# Altium PCB warship_demo_PCB.PcbDoc (part 2 of 3)
Units mm, origin at the board's own origin, x right, y up, seen from the top; angles counter-clockwise.
Board outline 160.38 x 121.38 mm, 2 copper layers (Top Layer, Bottom Layer); 272 components, 249 nets, 1200 pads, 295 vias.
Unrouted connection lines stored in the file: 2.
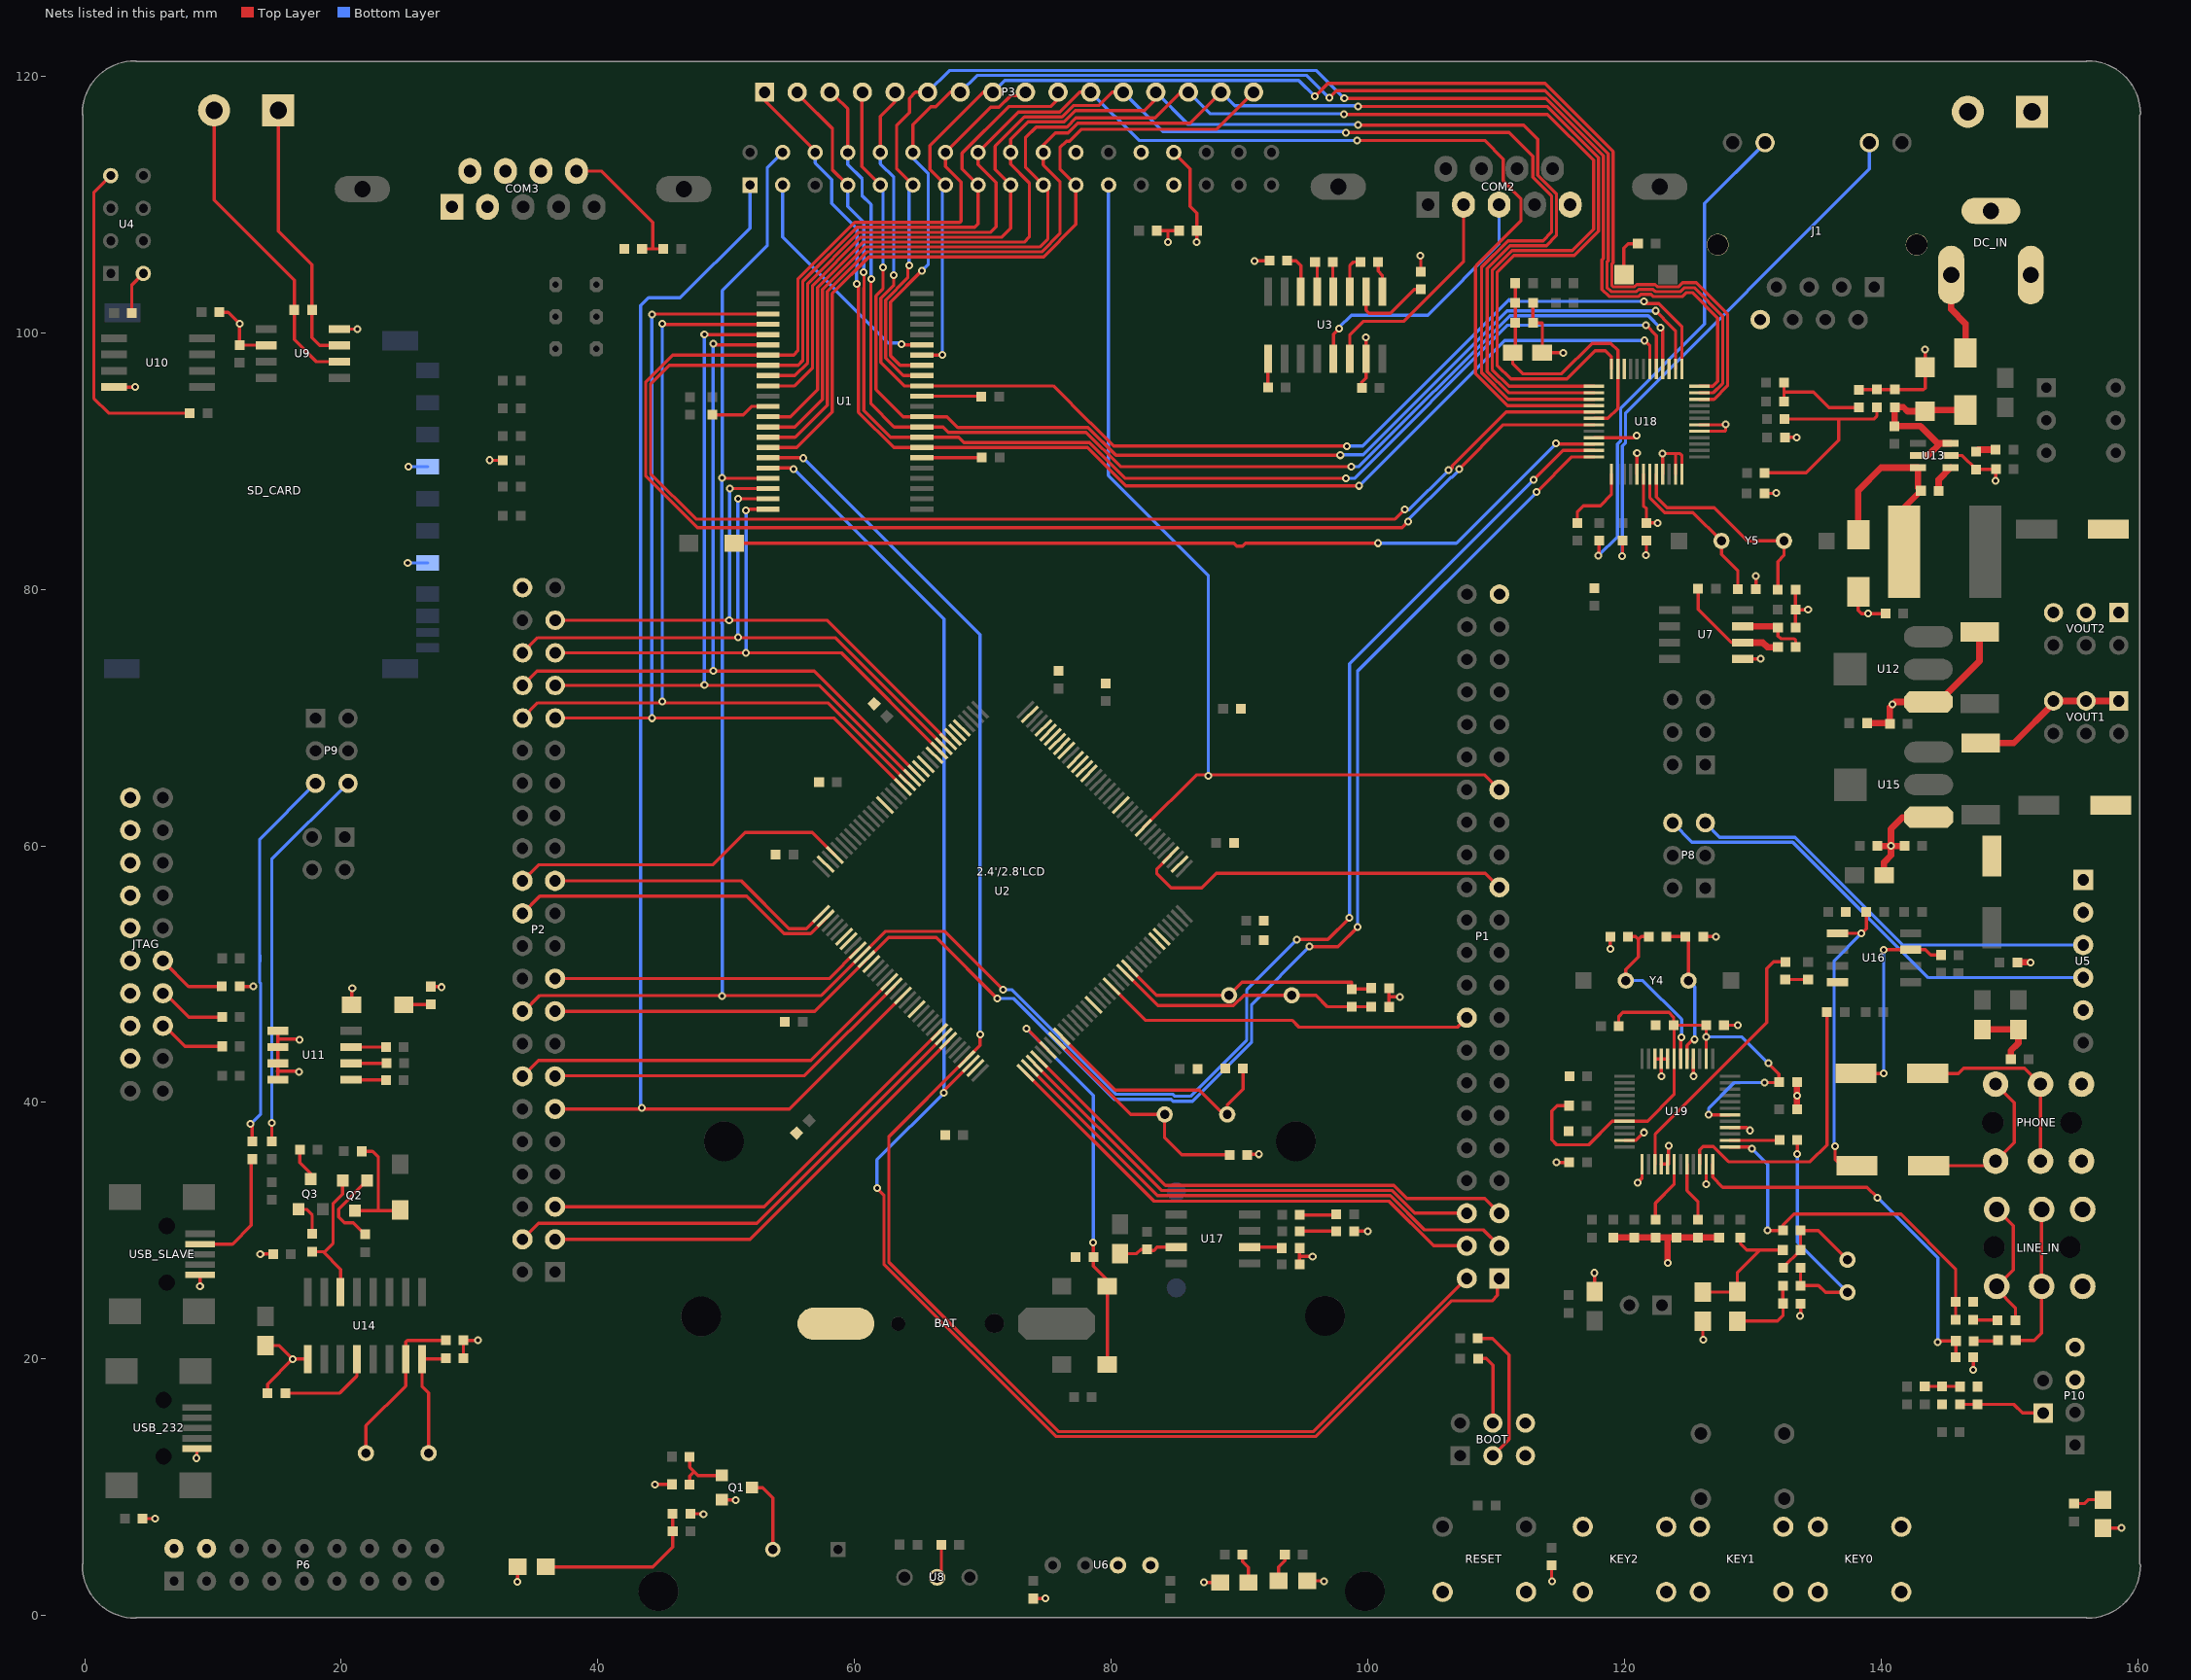
[diagram p2: the nets of this part, all layers, seen from the top]

## Via types
v1: diameter 0.61, hole 0.305, Top Layer to Bottom Layer, 291 vias
v2: diameter 3.58, hole 2.5, Top Layer to Bottom Layer, tented both sides, 4 vias

## Nets (pads, with @x,y where several pads share a name; then routed paths per layer and width w, separated by ;. In a path a pad name is that pad's centre, name@x,y a point inside that pad or via, vN(x,y) a via of type N, cw(c..) or ccw(c..) an arc to the next point about the centre after c; other vN are vias at no path point) (continued)
FSMC_A12: P2.38 U1.28 U2.87 | length 64.3
  Top Layer w0.254: P2.38@34.123,72.506 35.251,73.635 v1(48.971,73.635) 56.84,73.635 U2.87@64.819,65.656 ; v1(48.971,99.136) 48.971,99.052 U1.28@53.242,99.052
  Bottom Layer w0.254: v1(48.971,73.635) v1(48.971,99.136)
FSMC_A13: P2.37 U1.27 U2.88 | length 63
  Top Layer w0.254: P2.37@36.663,72.506 57.262,72.506 U2.88@64.465,65.303 ; v1(48.285,99.847) 48.29,99.852 U1.27@53.242,99.852
  Bottom Layer w0.254: v1(48.285,72.542) v1(48.285,99.847)
FSMC_A14: P2.36 U1.26 U2.89 | length 70.7
  Top Layer w0.254: P2.36@34.123,69.966 35.302,71.145 57.915,71.145 U2.89@64.112,64.949 ; v1(45.009,100.686) 45.042,100.652 U1.26@53.242,100.652
  Bottom Layer w0.254: v1(45.009,71.272) v1(45.009,100.686)
FSMC_A15: P2.35 U1.25 U2.90 | length 69.8
  Top Layer w0.254: P2.35@36.663,69.966 58.387,69.966 U2.90@63.758,64.596 ; v1(44.196,101.422) 44.226,101.452 U1.25@53.242,101.452
  Bottom Layer w0.254: v1(44.196,69.952) v1(44.196,101.422)
FSMC_A16: P2.41 U1.42 U2.80 | length 47.9
  Top Layer w0.254: P2.41@36.663,77.586 v1@50.216,77.586 ; v1(50.216,77.572) v1@50.216,77.586 ; v1(50.267,87.859) 50.273,87.852 U1.42@53.242,87.852 ; U2.80@67.294,68.131 57.838,77.586 v1@50.216,77.586
  Bottom Layer w0.254: v1(50.216,77.572) 50.267,77.521 v1(50.267,87.859)
FSMC_A17: P2.40 U1.43 U2.81 | length 49.9
  Top Layer w0.254: P2.40@34.123,75.046 35.302,76.225 58.492,76.225 U2.81@66.94,67.778 ; v1(50.902,87.046) 50.908,87.052 U1.43@53.242,87.052
  Bottom Layer w0.254: v1(50.902,76.251) v1(50.902,87.046)
FSMC_A18: P2.39 U1.44 U2.82 | length 45.9
  Top Layer w0.254: P2.39@36.663,75.046 58.964,75.046 U2.82@66.587,67.424 ; v1(51.537,86.131) 51.657,86.252 U1.44@53.242,86.252
  Bottom Layer w0.254: v1(51.537,75.057) v1(51.537,86.131)
FSMC_D0: 2.4'/2.8'LCD.6 P3.1 U1.7 U2.85 U18.18 | length 99.1
  Top Layer w0.254: P3.1@53.01,119.151 53.01,118.085 56.921,114.173 2.4'/2.8'LCD.6@56.921,114.046 ; v1(60.173,103.81) 60.249,103.81 60.3,103.759 60.3,93.797 63.044,91.052 U1.7@65.242,91.052 78.137,91.052 81.128,88.062 v1(99.314,88.062) ; v1(121.539,99.39) 121.963,98.966 U18.18@121.963,97.168
  Bottom Layer w0.254: 2.4'/2.8'LCD.6@56.921,114.046 56.921,113.233 58.217,111.938 58.217,110.058 60.173,108.102 60.173,104.981 60.147,104.956 60.147,103.835 v1(60.173,103.81) ; v1(99.314,88.062) 110.642,99.39 v1(121.539,99.39)
FSMC_D1: 2.4'/2.8'LCD.7 P3.2 U1.8 U2.86 U18.17 | length 98.9
  Top Layer w0.254: P3.2@55.207,118.427 55.74,118.427 58.268,115.9 58.268,112.696 2.4'/2.8'LCD.7@59.463,111.5 ; v1(60.706,104.724) 60.731,104.699 60.731,103.502 60.706,103.477 60.706,93.929 62.783,91.852 U1.8@65.242,91.852 68.092,91.852 68.511,91.433 78.295,91.433 81.082,88.646 v1(98.273,88.646) ; v1(121.659,100.584) 122.463,99.781 U18.17@122.463,97.168
  Bottom Layer w0.254: 2.4'/2.8'LCD.7@59.463,111.5 59.463,109.853 60.706,108.61 v1(60.706,104.724) ; v1(98.273,88.646) 98.933,88.646 110.871,100.584 v1(121.659,100.584)
FSMC_D2: 2.4'/2.8'LCD.8 P3.3 U1.9 U2.114 U18.16 | length 98
  Top Layer w0.254: P3.3@57.747,118.427 58.483,118.427 59.463,117.448 2.4'/2.8'LCD.8@59.463,114.04 ; v1(61.29,104.191) 61.265,104.165 61.265,94.463 63.075,92.652 U1.9@65.242,92.652 66.885,92.652 67.304,92.233 78.034,92.233 80.707,89.56 v1(98.679,89.56) ; v1(122.784,100.381) 122.963,100.202 U18.16@122.963,97.168
  Bottom Layer w0.254: 2.4'/2.8'LCD.8@59.463,114.04 59.463,113.104 60.579,111.989 60.579,110.693 61.29,109.982 v1(61.29,104.191) ; v1(98.679,89.56) 99.289,89.56 111.049,101.321 121.844,101.321 v1(122.784,100.381)
FSMC_D3: 2.4'/2.8'LCD.9 P3.4 U1.10 U2.115 U18.14 | length 96.8
  Top Layer w0.254: P3.4@60.554,118.745 60.554,112.954 2.4'/2.8'LCD.9@62.001,111.506 ; v1(62.205,105.08) 62.205,103.42 61.646,102.861 61.646,95.58 63.774,93.452 U1.10@65.242,93.452 67.203,93.452 68.041,92.614 78.192,92.614 80.356,90.449 v1(97.841,90.449) ; v1(122.428,101.702) 122.987,101.143 122.987,101.112 123.963,100.136 U18.14@123.963,97.168
  Bottom Layer w0.254: 2.4'/2.8'LCD.9@62.001,111.506 62.205,111.303 v1(62.205,105.08) ; v1(97.841,90.449) 97.866,90.475 99.619,90.475 110.846,101.702 v1(122.428,101.702)
FSMC_D4: 2.4'/2.8'LCD.10 P3.5 U1.13 U2.58 U18.13 | length 95.8
  Top Layer w0.254: 2.4'/2.8'LCD.10@62.001,114.046 62.001,116.865 63.094,117.958 P3.5@63.094,118.161 ; v1(63.043,104.47) 63.043,103.719 62.027,102.703 62.027,97.688 63.863,95.852 U1.13@65.242,95.852 75.471,95.852 78.328,92.995 78.35,92.995 80.184,91.161 v1(98.349,91.161) ; v1(121.514,102.438) 121.691,102.26 122.659,102.26 124.463,100.457 U18.13@124.463,97.168
  Bottom Layer w0.254: 2.4'/2.8'LCD.10@62.001,114.046 62.001,113.157 63.043,112.116 v1(63.043,104.47) ; v1(98.349,91.161) 99.593,91.161 110.998,102.565 111.125,102.438 v1(121.514,102.438)
FSMC_D5: 2.4'/2.8'LCD.11 P3.6 U1.14 U2.59 U18.12 | length 110.5
  Top Layer w0.254: v1(64.237,105.258) 64.135,105.156 64.135,104.272 62.408,102.545 62.408,98.039 63.794,96.652 U1.14@65.242,96.652 ; 2.4'/2.8'LCD.11@64.541,111.506 63.271,112.776 63.271,116.18 64.262,117.17 64.262,118.262 64.745,118.745 P3.6@65.684,118.745 ; v1(98.146,118.262) 113.874,118.262 118.339,113.797 118.339,105.774 118.237,105.672 118.237,103.37 118.788,102.819 121.09,102.819 121.268,102.997 122.039,102.997 122.217,102.819 124.519,102.819 124.824,103.124 125.273,103.124 127.254,101.143 127.254,96.19 126.882,95.818 U18.12@125.813,95.818
  Bottom Layer w0.254: v1(64.237,105.258) 64.237,111.201 2.4'/2.8'LCD.11@64.541,111.506 ; P3.6@65.684,118.745 67.374,120.435 95.973,120.435 v1(98.146,118.262)
FSMC_D6: 2.4'/2.8'LCD.12 P3.7 U1.15 U2.60 U18.11 | length 109.4
  Top Layer w0.254: 2.4'/2.8'LCD.12@64.541,114.046 64.541,116.205 65.938,117.602 66.319,117.602 67.462,118.745 P3.7@68.224,118.745 ; v1(65.227,104.826) 62.789,102.387 62.789,98.196 63.533,97.452 U1.15@65.242,97.452 ; v1(96.977,118.313) 97.536,118.872 113.803,118.872 118.72,113.955 118.72,105.616 118.618,105.514 118.618,103.528 118.945,103.2 120.932,103.2 121.11,103.378 122.197,103.378 122.374,103.2 124.361,103.2 124.666,103.505 125.431,103.505 127.635,101.301 127.635,96.032 126.921,95.318 U18.11@125.813,95.318
  Bottom Layer w0.254: 2.4'/2.8'LCD.12@64.541,114.046 64.541,113.589 65.735,112.395 65.735,105.334 v1(65.227,104.826) ; P3.7@68.224,118.745 69.533,120.054 95.237,120.054 v1(96.977,118.313)
FSMC_D7: 2.4'/2.8'LCD.13 P3.8 U1.16 U2.63 U18.10 | length 106
  Top Layer w0.254: U1.16@65.242,98.252 66.807,98.252 v1(66.827,98.273) ; 2.4'/2.8'LCD.13@67.081,111.506 65.862,112.725 65.862,114.579 70.028,118.745 P3.8@70.764,118.745 ; v1(95.86,118.415) 96.876,119.431 113.783,119.431 119.101,114.113 119.101,105.458 118.999,105.357 118.999,103.685 119.103,103.581 120.774,103.581 120.952,103.759 122.354,103.759 122.532,103.581 124.203,103.581 124.508,103.886 125.588,103.886 128.016,101.458 128.016,95.874 126.96,94.818 U18.10@125.813,94.818
  Bottom Layer w0.254: v1(66.827,98.273) 66.827,111.252 2.4'/2.8'LCD.13@67.081,111.506 ; P3.8@70.764,118.745 71.692,119.673 94.602,119.673 v1(95.86,118.415)
FSMC_D8: 2.4'/2.8'LCD.14 P3.9 U1.29 U2.64 U18.31 | length 133.4
  Top Layer w0.254: P3.9@73.304,118.745 73.025,118.466 72.136,118.466 71.247,117.577 70.612,117.577 2.4'/2.8'LCD.14@67.081,114.046 67.081,112.954 68.301,111.735 68.301,108.687 68.199,108.585 60.005,108.585 55.575,104.155 55.575,98.577 55.25,98.252 U1.29@53.242,98.252 45.821,98.252 43.713,96.144 43.713,88.844 47.747,84.811 102.641,84.811 v1(103.124,85.293) ; v1(107.112,89.383) 107.112,89.385 110.544,92.818 U18.31@117.613,92.818
  Bottom Layer w0.254: v1(103.124,85.293) 103.124,85.395 106.451,88.722 106.505,88.722 107.112,89.329 v1(107.112,89.383)
FSMC_D9: 2.4'/2.8'LCD.15 P3.10 U1.30 U2.65 U18.29 | length 135
  Top Layer w0.254: P3.10@75.794,118.161 75.26,117.627 71.984,117.627 68.351,113.995 68.351,112.776 2.4'/2.8'LCD.15@69.621,111.506 69.621,108.483 69.342,108.204 60.163,108.204 55.956,103.998 55.956,97.821 55.587,97.452 U1.30@53.242,97.452 45.56,97.452 44.094,95.987 44.094,89.002 47.625,85.471 102.108,85.471 v1(102.845,86.208) ; v1(106.274,89.281) 106.375,89.281 106.553,89.459 106.553,89.614 110.757,93.818 U18.29@117.613,93.818
  Bottom Layer w0.254: v1(102.845,86.208) 103.2,86.208 v1(106.274,89.281)
FSMC_D10: 2.4'/2.8'LCD.16 P3.11 U1.31 U2.66 U18.28 | length 106.6
  Top Layer w0.254: U1.31@53.242,96.652 55.326,96.652 56.337,97.663 56.337,103.84 60.32,107.823 70.587,107.823 71.018,108.255 71.018,111.709 69.621,113.106 2.4'/2.8'LCD.16@69.621,114.046 72.771,117.196 75.997,117.196 77.546,118.745 P3.11@78.384,118.745 ; v1(99.162,114.986) 109.093,114.986 110.541,113.538 110.541,111.836 111.912,110.465 111.912,108.708 108.467,105.263 108.467,105.241 108.382,105.156 108.382,96.809 110.873,94.318 U18.28@117.613,94.318
  Bottom Layer w0.254: P3.11@78.384,118.745 82.144,114.986 v1(99.162,114.986)
FSMC_D11: 2.4'/2.8'LCD.17 P3.12 U1.32 U2.67 U18.27 | length 111.3
  Top Layer w0.254: U1.32@53.242,95.852 55.314,95.852 56.718,97.257 56.718,103.682 60.478,107.442 71.476,107.442 72.161,108.128 2.4'/2.8'LCD.17@72.161,111.506 70.942,112.725 70.942,114.529 73.228,116.815 76.155,116.815 77.044,117.704 79.019,117.704 80.061,118.745 P3.12@80.924,118.745 ; v1(98.273,115.595) 110.998,115.595 112.852,113.741 112.852,112.11 114.3,110.662 114.3,107.823 113.64,107.163 110.906,107.163 108.848,105.105 108.848,96.881 110.911,94.818 U18.27@117.613,94.818
  Bottom Layer w0.254: P3.12@80.924,118.745 83.998,115.672 98.196,115.672 v1(98.273,115.595)
FSMC_D12: 2.4'/2.8'LCD.18 P3.13 U1.35 U2.68 U18.26 | length 114.5
  Top Layer w0.254: U1.35@53.242,93.452 54.996,93.452 57.099,95.555 57.099,103.524 60.636,107.061 73.203,107.061 73.609,107.467 73.609,111.684 72.161,113.132 2.4'/2.8'LCD.18@72.161,114.046 72.161,115.087 73.508,116.434 76.312,116.434 77.201,117.323 82.575,117.323 P3.13@83.414,118.161 ; v1(99.238,116.18) 112.116,116.18 113.233,115.062 113.233,112.268 114.681,110.82 114.681,107.569 113.894,106.782 111.063,106.782 109.296,105.014 109.296,96.972 110.95,95.318 U18.26@117.613,95.318
  Bottom Layer w0.254: P3.13@83.464,118.745 85.979,116.23 v1@99.289,116.23
FSMC_D13: 2.4'/2.8'LCD.19 P3.14 U1.36 U2.77 U18.25 | length 120.3
  Top Layer w0.254: U1.36@53.242,92.652 55.339,92.652 57.48,94.793 57.48,103.366 60.794,106.68 74.411,106.68 75.057,107.326 75.057,111.15 2.4'/2.8'LCD.19@74.701,111.506 73.304,112.903 73.304,115.189 74.143,116.027 76.53,116.027 77.241,116.738 83.414,116.738 85.42,118.745 P3.14@86.004,118.745 ; v1(98.12,117.018) 113.995,117.018 117.577,113.436 117.577,108.057 115.92,106.401 111.221,106.401 109.677,104.857 109.677,97.13 110.989,95.818 U18.25@117.613,95.818
  Bottom Layer w0.254: P3.14@86.004,118.745 87.681,117.069 98.069,117.069 v1(98.12,117.018)
FSMC_D14: 2.4'/2.8'LCD.20 P3.15 U1.37 U2.78 U18.24 | length 122.7
  Top Layer w0.254: U1.37@53.242,91.852 55.352,91.852 57.861,94.361 57.861,103.208 60.952,106.299 74.569,106.299 75.997,107.727 75.997,111.785 74.701,113.081 2.4'/2.8'LCD.20@74.701,114.046 74.701,114.63 75.641,115.57 76.612,115.57 77.374,116.332 86.131,116.332 P3.15@88.544,118.745 ; v1(99.212,117.627) 113.97,117.627 117.958,113.64 117.958,107.899 116.078,106.02 111.379,106.02 110.058,104.699 110.058,97.46 111.125,96.393 115.494,96.393 117.704,98.603 118.491,98.603 118.963,98.131 U18.24@118.963,97.168
  Bottom Layer w0.254: P3.15@88.544,118.745 89.611,117.678 99.162,117.678 v1(99.212,117.627)
FSMC_D15: 2.4'/2.8'LCD.21 P3.16 U1.38 U2.79 U18.22 | length 60
  Top Layer w0.254: U1.38@53.242,91.052 55.492,91.052 58.242,93.802 58.242,103.051 61.11,105.918 74.727,105.918 77.241,108.433 2.4'/2.8'LCD.21@77.241,111.506 75.997,112.751 75.997,114.427 76.505,114.935 76.733,114.935 77.648,115.849 88.189,115.849 P3.16@91.084,118.745
FSMC_NBL0: P1.2 U1.39 U2.141 | length 129.5
  Top Layer w0.254: U1.39@53.242,90.252 55.976,90.252 v1(56.007,90.221) ; v1(69.774,45.288) 69.774,44.448 U2.141@68.708,43.382 62.662,37.336 62.662,27.559 75.87,14.351 95.758,14.351 P1.2@107.696,26.289
  Bottom Layer w0.254: v1(56.007,90.221) 69.774,76.454 v1(69.774,45.288)
FSMC_NBL1: P1.1 U1.40 U2.142 | length 134
  Top Layer w0.254: U1.40@53.242,89.452 55.176,89.452 v1(55.245,89.383) ; v1(61.747,33.325) 62.281,32.791 62.281,27.401 75.712,13.97 95.916,13.97 106.482,24.536 109.652,24.536 110.084,24.968 110.084,26.441 P1.1@110.236,26.289 ; v1(66.954,40.742) 66.954,40.922 U2.142@69.061,43.029
  Bottom Layer w0.254: v1(55.245,89.383) 66.954,77.673 v1(66.954,40.742) 61.747,35.535 v1(61.747,33.325)
FSMC_NE2: P2.14 R64.1 U2.124 U18.37 | length 37.3
  Top Layer w0.254: P2.14@34.112,42.037 35.357,43.282 56.586,43.282 U2.124@62.697,49.393 ; R64.1@116.308,85.166 116.308,86.031 116.789,86.512 118.114,86.512 118.963,87.361 U18.37@118.963,88.968
FSMC_NE3: P2.13 R1.1 U1.6 U2.125 | length 34
  Top Layer w0.254: P2.13@36.652,42.037 36.703,42.088 56.1,42.088 U2.125@63.051,49.039 ; U1.6@65.242,90.252 69.881,90.252 R1.1@69.901,90.272
FSMC_NE4: 2.4'/2.8'LCD.1 P2.11 U2.127 | length 107.7
  Top Layer w0.254: P2.11@36.652,39.497 54.923,39.497 U2.127@63.758,48.332
  Bottom Layer w0.254: v1(43.409,39.573) 43.332,39.649 43.332,102.108 43.942,102.718 46.406,102.718 51.841,108.153 2.4'/2.8'LCD.1@51.841,111.506
FSMC_NOE: 2.4'/2.8'LCD.4 P2.18 U1.41 U2.118 U18.35 | length 197.4
  Top Layer w0.254: P2.18@34.112,47.117 34.239,47.117 35.458,48.336 57.398,48.336 U2.118@60.576,51.514 62.402,53.34 67.005,53.34 v1(71.552,48.793) ; v1(49.682,88.697) 49.727,88.652 U1.41@53.242,88.652 ; v1(94.463,52.705) 96.876,52.705 v1(98.552,54.381) ; v1(112.903,88.544) 115.176,90.818 U18.35@117.613,90.818
  Bottom Layer w0.254: v1(49.682,48.311) 49.682,77.315 49.657,77.34 49.657,88.671 v1(49.682,88.697) 49.682,103.276 53.188,106.782 53.188,112.852 2.4'/2.8'LCD.4@54.381,114.046 ; v1(71.552,48.793) 72.226,48.793 80.379,40.64 84.803,40.64 84.955,40.488 86.157,40.488 90.551,44.882 90.551,48.793 v1(94.463,52.705) ; v1(98.552,54.381) 98.552,74.193 v1(112.903,88.544)
FSMC_NWE: 2.4'/2.8'LCD.3 P2.17 U1.17 U2.119 U18.36 | length 141.2
  Top Layer w0.254: P2.17@36.652,47.117 56.886,47.117 U2.119@60.93,51.161 62.627,52.857 66.345,52.857 v1(71.095,48.108) ; v1(63.652,99.111) 63.711,99.052 U1.17@65.242,99.052 ; v1(95.428,52.146) 97.663,52.146 v1(99.187,53.67) ; v1(113.132,87.579) 115.87,90.318 U18.36@117.613,90.318
  Bottom Layer w0.254: 2.4'/2.8'LCD.3@54.381,111.506 54.381,107.442 62.611,99.212 63.551,99.212 v1(63.652,99.111) ; v1(71.095,48.108) 72.373,48.108 80.221,40.259 84.645,40.259 84.797,40.107 86.315,40.107 90.932,44.724 90.932,47.65 v1(95.428,52.146) ; v1(99.187,53.67) 99.187,73.635 v1(113.132,87.579)
GBC_KEY: P1.25 P10.3 U2.40 U5.2 | length 30
  Top Layer w0.254: U2.40@84.618,59.292 83.541,58.215 83.541,57.836 84.658,56.718 87.046,56.718 88.189,57.861 109.144,57.861 P1.25@110.236,56.769
GBC_LED: JTAG.5 P2.24 R6.2 U2.110 U5.1 | length 31.2
  Top Layer w0.254: JTAG.5@6.096,45.974 6.223,45.974 7.822,44.375 R6.2@10.706,44.375 ; P2.24@34.112,54.737 35.458,56.083 51.587,56.083 54.508,53.162 56.567,53.162 U2.110@57.748,54.343
GBC_RX: P8.5 U5.3 | length 33.4
  Bottom Layer w0.254: P8.5@126.289,61.798 127.406,60.681 133.254,60.681 141.661,52.273 U5.3@155.727,52.273
GBC_TX: P8.6 U5.4 | length 37
  Bottom Layer w0.254: P8.6@123.749,61.798 125.247,60.3 133.096,60.3 143.662,49.733 U5.4@155.727,49.733
GBUF: R77.2 U19.42 | length 4.9
  Top Layer w0.254: R77.2@122.403,30.861 122.403,32.157 123.85,33.604 U19.42@123.85,35.196
GND: 2.4'/2.8'LCD.22 2.4'/2.8'LCD.26 2.4'/2.8'LCD.27 BAT.2 BOOT.5 BOOT.6 C1.1 C2.2 C3.1 C4.2 C5.1 C6.1 C7.1 C8.1 C9.2 C10.1 C11.2 C12.2 C13.1 C14.1 C15.1 C16.1 C17.1 C18.1 C19.1 C20.1 C21.1 C22.1 C23.1 C24.1 C25.1 C26.2 C28.2 C30.2 C31.2 C32.1 C33.2 C34.1 C35.2 C36.2 C37.1 C38.1 C39.1 C42.1 C43.1 C44.2 C45.1 C46.1 C47.2 C48.1 C49.1 C50.2 C51.1 C52.1 C53.1 C54.1 C55.1 C56.1 C57.1 C63.1 C64.1 C65.2 C66.1 C67.1 C68.1 C69.1 C70.2 C71.2 C72.1 C74.1 C75.1 C76.1 C77.1 C78.1 C79.1 C80.1 C81.1 C82.1 C83.1 C84.1 C85.1 C86.1 C87.1 C88.2 C89.1 C91.1 C92.1 C93.1 C94.1 C97.1 C98.1 C100.2 C103.1 C104.1 C105.1 C106.1 COM2.5 COM3.1 COM3.6 COM3.7 COM3.8 D3.1 D4.1 D6.2 D7.2 DC_IN.2 DC_IN.3 J1.8 J1.13 J1.14 JTAG.4 JTAG.6 JTAG.8 JTAG.10 JTAG.12 JTAG.14 JTAG.16 JTAG.18 JTAG.20 KEY0.1 KEY1.1 KEY2.1 LINE_IN.3 LS1.1 P1.43 P2.44 P6.2 P10.4 PHONE.3 PWR.2 Q1.1 R13.1 R19.2 R38.1 R43.2 R52.2 R60.2 R62.2 R63.1 R70.1 R76.2 R77.1 RESET.2 SD_CARD.3 SD_CARD.6 U1.12 U1.34 U2.16 U2.30 U2.31 U2.38 U2.51 U2.61 U2.71 U2.83 U2.94 U2.107 U2.120 U2.130 U2.143 U3.15 U4.1 U5.5 U6.3 U6.4 U7.5 U8.2 U9.2 U9.8 U10.4 U11.1 U11.2 U11.3 U11.4 U12.1 U13.2 U14.1 U15.1 U16.4 U17.7 U18.5 U18.6 U18.15 U18.33 U18.41 U18.45 U18.47 U18.48 U19.4 U19.16 U19.20 U19.21 U19.22 U19.35 U19.37 U19.40 U19.41 U19.47 USB_232.5 USB_SLAVE.5 VOUT1.1 VOUT1.3 VOUT1.5 VOUT2.1 VOUT2.3 VOUT2.5 | length 205.1
  Top Layer w0.254: U10.4@2.286,95.758 v1(3.937,95.758) ; C31.2@3.67,101.522 3.67,103.721 U4.1@4.572,104.623 ; C26.2@4.508,7.568 5.485,7.568 v1(5.483,7.569) ; v1(8.696,12.284) 8.747,12.284 USB_232.5@8.747,13.021 ; v1(8.993,25.681) USB_SLAVE.5@8.993,26.569 ; C38.1@10.49,101.6 11.176,101.6 v1(12.065,100.711) C37.1@12.065,99.035 14.116,99.035 U9.2@14.14,99.011 ; R13.1@12.065,49.047 v1(13.157,49.047) ; v1(13.691,28.194) C50.2@14.681,28.194 ; C51.1@14.099,21.057 15.145,21.057 v1(16.196,20.006) ; C55.1@14.249,17.348 14.249,18.059 v1(16.196,20.006) ; 15.026,42.443 v1@16.662,42.443 ; U11.4@15.052,41.781 U11.3@15.052,43.051 U11.2@15.052,44.321 U11.1@15.052,45.591 ; 15.052,44.933 v1@16.688,44.933 ; U14.1@17.399,20.006 v1(16.196,20.006) ; U9.8@20.269,100.281 20.271,100.279 v1(21.26,100.279) ; D3.1@20.803,47.623 20.803,48.87 v1(20.853,48.92) ; C56.1@29.515,20.066 C57.1@29.515,21.463 v1(30.632,21.463) ; v1(31.547,90.068) 31.571,90.045 C36.2@32.575,90.045 ; v1(33.731,2.642) LS1.1@33.731,3.81 ; v1(44.453,10.236) 44.452,10.238 R38.1@45.758,10.238 ; C1.1@48.92,93.599 51.308,93.599 51.961,94.252 U1.34@53.242,94.252 ; Q1.1@49.65,9.032 50.709,9.032 v1(50.724,9.017) ; U1.12@65.242,95.052 69.834,95.052 C2.2@69.863,95.023 ; U8.2@66.421,2.997 66.751,3.327 C39.1@66.751,5.537 ; C35.2@73.912,1.333 74.663,1.333 74.676,1.346 v1(74.854,1.346) ; C65.2@80.67,28.219 81.966,28.219 82.296,28.55 C66.1@82.779,28.55 82.855,28.473 83.312,28.473 83.566,28.727 U17.7@85.065,28.727 ; C3.1@83.541,107.95 84.41,107.95 ; v1(84.404,107.061) 84.41,107.067 84.41,107.95 ; C4.2@85.281,107.952 85.279,107.95 84.41,107.95 ; C5.1@90.576,35.966 v1(91.491,35.966) ; v1(91.161,105.588) 91.44,105.588 91.413,105.615 C30.2@92.316,105.615 ; R52.2@94.666,27.381 94.666,28.016 ; C67.1@94.666,28.651 94.666,28.016 ; v1(95.682,27.991) 95.656,28.016 94.666,28.016 ; C72.1@98.908,29.972 v1(99.974,29.972) ; C25.1@99.517,95.682 99.517,96.139 99.847,96.469 U3.15@99.847,97.984 v1(99.847,99.644) ; C9.2@101.638,47.446 101.638,48.235 ; C8.1@101.638,48.919 101.638,48.235 ; v1(102.489,48.235) 101.638,48.235 ; v1(104.089,105.994) 104.116,105.967 C28.2@104.116,104.762 ; C83.1@112.852,102.311 C84.1@112.852,100.762 113.589,100.762 113.589,98.476 C86.1@113.563,98.45 115.189,98.45 v1(115.214,98.425) ; C12.2@114.298,3.924 114.298,2.694 v1(114.325,2.667) ; v1(114.681,35.331) 114.683,35.33 R70.1@115.672,35.33 ; U18.33@117.613,91.818 120.774,91.818 v1(120.929,91.973) ; v1(117.627,26.721) 117.653,26.695 C10.1@117.653,25.273 ; v1(118.872,51.968) C87.1@118.872,52.934 ; C82.1@119.939,104.521 119.939,106.604 120.269,106.934 C81.1@121.031,106.934 ; U19.35@120,37.046 120.866,37.046 v1(121.488,37.668) ; v1(120.955,90.627) 120.963,90.619 U18.41@120.963,88.968 ; v1(121.006,33.757) 121.35,34.101 U19.37@121.35,35.196 ; v1(121.666,82.652) 121.691,82.677 C85.1@121.691,83.795 ; U19.22@122.35,43.396 U19.21@122.85,43.396 ; U19.40@122.85,35.196 123.419,35.196 v1(123.419,36.627) ; v1(122.85,42.046) U19.21@122.85,43.396 ; U18.45@122.963,88.968 122.963,90.575 122.961,90.576 123.914,90.576 ; U19.20@123.35,43.396 U19.21@122.85,43.396 ; U18.47@123.963,88.968 123.963,90.528 123.914,90.576 ; U18.48@124.463,88.968 124.463,90.421 124.308,90.576 123.914,90.576 ; v1(125.35,42.064) U19.16@125.35,43.396 ; U18.5@125.813,92.318 127.799,92.318 127.864,92.383 v1(127.864,92.837) 127.844,92.818 U18.6@125.813,92.818 ; C89.1@126.086,22.936 126.086,21.539 v1(126.111,21.514) ; C88.2@126.111,52.934 v1(127.102,52.934) ; v1(126.35,33.64) U19.47@126.35,35.196 ; C74.1@127.737,46.025 v1(128.803,46.025) ; U19.4@128.2,38.046 129.518,38.046 129.743,37.821 v1(129.769,37.821) ; U7.5@129.195,74.574 130.556,74.574 v1(130.581,74.6) ; C97.1@130.2,80.01 130.226,80.035 v1(130.226,81.026) ; R63.1@130.886,87.478 131.75,87.478 v1(131.801,87.528) ; C100.2@132.474,91.845 133.399,91.845 v1(133.401,91.846) ; C98.1@133.312,79.958 C34.1@133.312,78.41 ; R19.2@133.325,77.013 133.312,77.025 C34.1@133.312,78.41 ; v1(133.68,23.368) 133.719,23.407 R76.2@133.719,24.33 ; v1(134.29,78.41) C34.1@133.312,78.41 ; D4.1@138.201,79.807 138.201,78.359 138.454,78.107 C54.1@140.322,78.107 ; C106.1@138.252,95.555 143.281,95.555 143.408,95.682 C48.1@143.408,97.307 v1(143.408,98.704) ; U13.2@145.39,90.424 146.315,90.424 R43.2@147.395,89.344 148.907,89.344 C46.1@148.92,89.357 148.92,88.468 v1(148.895,88.443) ; v1(147.168,19.152) C103.1@147.168,20.142 ; PWR.2@157.277,6.832 v1(158.724,6.832)
  Top Layer w0.508: C42.1@119.099,29.477 C91.1@120.75,29.477 R77.1@122.402,29.477 123.342,29.477 ; v1(123.368,27.483) 123.342,27.508 123.342,29.477 ; C93.1@127.355,29.477 C94.1@125.704,29.477 C92.1@124.053,29.477 123.342,29.477 ; C79.1@133.426,39.472 C76.1@133.426,41.58 ; C43.1@138.887,69.571 140.614,69.571 C45.1@140.665,69.52 140.665,70.815 141.072,71.222 U12.1@143.662,71.222 144.475,71.222 147.65,74.397 D6.2@147.65,76.683 ; C52.1@139.7,59.995 v1(140.747,59.995) ; C53.1@140.208,57.709 140.208,58.725 140.747,59.264 v1(140.747,59.995) ; C71.2@141.796,59.996 141.794,59.995 v1(140.747,59.995) ; U15.1@143.688,62.23 141.656,62.23 140.747,61.321 v1(140.747,59.995) ; D7.2@147.752,68.021 150.317,68.021 153.594,71.298 VOUT1.3@155.956,71.298 VOUT1.1@158.496,71.298 ; C68.1@147.88,45.695 C69.1@150.674,45.695 150.674,44.629 150.089,44.044 C32.1@150.089,43.358 ; R60.2@150.584,50.925 151.614,50.925 v1(151.638,50.902)
  Bottom Layer w0.254: v1(25.171,82.067) 25.185,82.054 SD_CARD.6@26.721,82.054 ; v1(25.222,89.56) 25.229,89.554 SD_CARD.3@26.721,89.554
  other v1: 133.426,40.526 16.713,42.393 16.739,44.882 140.868,71.018 138.963,78.107 122.955,90.583
IIC_SCL: P2.4 R39.2 U2.136 U11.6 | length 42.1
  Top Layer w0.254: U11.6@20.752,43.051 20.755,43.055 R39.2@23.508,43.055 ; P2.4@34.112,29.337 35.357,30.582 52.372,30.582 U2.136@66.94,45.15
IIC_SDA: P2.3 R40.2 U2.137 U11.5 | length 39.8
  Top Layer w0.254: U11.5@20.752,41.781 20.774,41.759 R40.2@23.482,41.759 ; P2.3@36.652,29.337 51.834,29.337 U2.137@67.294,44.797
IOVDD: C74.2 C75.2 C76.2 R67.1 R68.2 U19.6 U19.14 U19.19 U19.32 | length 47.5
  Top Layer w0.254: R68.2@115.659,39.753 114.733,39.753 114.325,39.345 114.325,37.084 114.706,36.703 117.19,36.703 119.033,38.546 U19.32@120,38.546 121.782,38.546 123.85,40.615 U19.19@123.85,43.396 123.85,45.985 C75.2@123.812,46.023 ; R67.1@119.532,45.949 119.532,46.685 119.863,47.015 123.444,47.015 123.812,46.647 C75.2@123.812,46.023 ; U19.14@126.35,43.396 C74.2@126.35,45.989 ; C74.2@126.352,46.026 126.349,46.023 C75.2@123.812,46.023 ; v1(126.543,39.04) 126.549,39.046 U19.6@128.2,39.046 ; v1(130.912,41.554) 132.015,41.554 132.015,42.229 v1(131.191,43.053)
  Bottom Layer w0.254: v1(126.365,45.11) 129.134,45.11 v1(131.191,43.053) ; v1(126.543,39.04) 126.543,39.548 128.549,41.554 v1(130.912,41.554)
JOY_CLK: D3.2 P2.19 P6.4 R14.1 U2.117 | length 26.6
  Top Layer w0.254: D3.2@24.867,47.623 26.948,47.623 R14.1@26.975,47.65 ; P2.19@36.652,49.657 58.012,49.657 U2.117@60.223,51.868
JTCK: JTAG.9 P2.25 R13.2 U2.109 | length 28.2
  Top Layer w0.254: JTAG.9@6.096,51.054 8.101,49.049 R13.2@10.681,49.049 ; P2.25@36.652,57.277 51.156,57.277 54.889,53.543 56.241,53.543 U2.109@57.394,54.696
JTMS: JTAG.7 P2.26 R7.2 U2.105 | length 32
  Top Layer w0.254: JTAG.7@6.096,48.514 6.274,48.514 8.126,46.661 R7.2@10.706,46.661 ; P2.26@34.112,57.277 35.357,58.522 48.946,58.522 51.46,61.036 56.711,61.036 U2.105@58.455,59.292
KEY0: KEY0.2 P1.6 U2.3 | length 38.5
  Top Layer w0.254: U2.3@74.011,43.029 83.893,33.147 101.859,33.147 103.637,31.369 P1.6@107.696,31.369
KEY1: KEY1.2 P1.3 U2.2 | length 42.3
  Top Layer w0.254: U2.2@73.658,42.675 83.592,32.741 101.727,32.741 104.394,30.074 108.991,30.074 P1.3@110.236,28.829
KEY2: KEY2.2 P1.4 U2.1 | length 40
  Top Layer w0.254: U2.1@73.304,42.322 83.317,32.309 101.62,32.309 105.1,28.829 P1.4@107.696,28.829
LCD_BL: 2.4'/2.8'LCD.23 P1.31 U2.46 | length 79.2
  Top Layer w0.254: U2.46@82.496,61.414 86.615,65.532 109.093,65.532 P1.31@110.236,64.389
  Bottom Layer w0.254: 2.4'/2.8'LCD.23@79.781,111.506 79.781,88.875 87.554,81.102 v1(87.554,65.456)
LED0: DS0.2 P2.5 U2.135 | length 36.9
  Top Layer w0.254: P2.5@36.652,31.877 52.96,31.877 U2.135@66.587,45.504 ; v1(87.198,2.616) 87.224,2.591 DS0.2@88.468,2.591
LED1: DS1.2 P1.5 U2.4 | length 42.2
  Top Layer w0.254: U2.4@74.365,43.382 84.219,33.528 102.017,33.528 103.033,32.512 109.093,32.512 P1.5@110.236,31.369 ; DS1.2@95.25,2.718 96.545,2.718 v1(96.571,2.692)
LEDA: J1.10 R74.1 | length 41.4
  Top Layer w0.254: v1(119.812,82.575) 119.837,82.601 R74.1@119.837,83.795
  Bottom Layer w0.254: v1(119.812,82.575) 119.812,91.178 120.066,91.432 120.066,93.751 139.065,112.751 J1.10@139.065,114.808
LEDB: J1.11 R72.1 | length 38.7
  Top Layer w0.254: v1(117.958,82.626) 118.008,82.677 R72.1@118.008,83.795
  Bottom Layer w0.254: v1(117.958,82.626) 119.431,84.099 119.431,91.336 119.685,91.59 119.685,94.132 126.223,100.671 126.223,110.069 130.937,114.783 J1.11@130.937,114.808
LIGHT_SENSOR: P1.18 R37.1 U2.20 | length 30.3
  Top Layer w0.254: R37.1@47.193,7.95 48.184,7.95 v1(48.209,7.925) ; U2.20@80.022,49.039 82.655,46.406 94.074,46.406 94.608,45.872 106.959,45.872 P1.18@107.696,46.609
MP3_LEFT: C60.2 U19.46 | length 22.5
  Top Layer w0.254: U19.46@125.85,35.196 125.85,36.315 126.111,36.576 126.898,36.576 128.092,35.382 134.442,35.382 135.757,36.697 C60.2@135.757,47.041
MP3_RIGHT: C59.2 U19.39 | length 20.5
  Top Layer w0.254: U19.39@122.35,35.196 122.377,35.223 122.377,36.805 122.377,37.541 131.064,46.228 131.064,50.444 131.585,50.965 C59.2@132.512,50.965
Net2.4'/2.8'LCD_28: 2.4'/2.8'LCD.28 C4.1 | length 7.7
  Top Layer w0.254: 2.4'/2.8'LCD.28@84.861,114.046 86.131,112.776 86.131,109.855 86.665,109.322 C4.1@86.665,107.95 86.665,107.086 v1(86.639,107.061)
NetBEEP_2: BEEP.2 Q1.3 | length 6
  Top Layer w0.254: Q1.3@52,9.982 52.832,9.982 53.619,9.195 BEEP.2@53.619,5.156
NetBOOT_3: BOOT.3 R11.1 | length 11.3
  Top Layer w0.254: R11.1@108.56,21.615 109.703,21.615 110.998,20.32 110.998,13.741 BOOT.3@109.728,12.471
NetBOOT_4: BOOT.4 R12.2 | length 5.9
  Top Layer w0.254: R12.2@108.572,20.039 109.222,20.039 109.728,19.533 BOOT.4@109.728,15.011
NetC5_2: C5.2 U2.8 Y1.2 | length 18.1
  Top Layer w0.254: U2.8@75.779,44.797 81.51,39.065 Y1.2@84.15,39.065 84.15,37.262 85.495,35.917 C5.2@89.192,35.917
NetC6_2: C6.2 U2.9 Y1.1 | length 19.5
  Top Layer w0.254: U2.9@76.132,45.15 80.312,40.97 86.843,40.97 88.748,39.065 Y1.1@89.03,39.065 89.03,39.805 90.259,41.034 C6.2@90.259,42.645
NetC7_2: C7.2 D1.2 D2.2 U2.6 | length 31.2
  Top Layer w0.254: v1(73.381,45.771) 73.39,45.771 U2.6@75.072,44.089 ; v1(78.588,29.083) 78.6,29.07 C7.2@78.6,27.964 78.6,27.241 79.68,26.162 D2.2@79.68,25.679 D1.2@79.68,19.583
  Bottom Layer w0.254: v1(73.381,45.771) 78.588,40.564 v1(78.588,29.083)
NetC8_2: C8.2 R2.1 U2.24 Y2.2 | length 20.7
  Top Layer w0.254: U2.24@81.436,50.453 83.496,48.393 ; 83.496,48.362 Y2.2@89.179,48.362 90.195,49.378 98.73,49.378 R2.1@98.73,48.844 100.178,48.844 C8.2@100.254,48.92
NetC9_1: C9.1 R2.2 U2.23 Y2.1 | length 20.9
  Top Layer w0.254: U2.23@81.082,50.1 83.633,47.549 89.516,47.549 90.329,48.362 Y2.1@94.059,48.362 95.936,48.362 96.837,47.46 R2.2@98.728,47.46 100.241,47.46 C9.1@100.254,47.447
NetC27_1: C27.1 U3.1 | length 2.5
  Top Layer w0.254: C27.1@100.787,105.512 100.787,104.8 101.117,104.47 U3.1@101.117,103.184
NetC27_2: C27.2 U3.3 | length 3
  Top Layer w0.254: U3.3@98.577,103.184 98.577,105.207 98.884,105.513 C27.2@99.403,105.513
NetC28_1: C28.1 U3.2 | length 6.6
  Top Layer w0.254: U3.2@99.847,103.184 99.847,101.752 100.076,101.524 101.752,101.524 103.607,103.378 C28.1@104.115,103.378
NetC29_1: C29.1 U3.4 | length 2.3
  Top Layer w0.254: C29.1@97.257,105.512 97.257,103.235 U3.4@97.307,103.184
NetC29_2: C29.2 U3.5 | length 2.4
  Top Layer w0.254: C29.2@95.872,105.513 96.037,105.348 U3.5@96.037,103.184
NetC30_1: C30.1 U3.6 | length 3.3
  Top Layer w0.254: C30.1@93.701,105.613 94.386,105.613 94.767,105.232 U3.6@94.767,103.184
NetC33_1: C33.1 COM3.9 R15.2 | length 11.3
  Top Layer w0.254: COM3.9@38.329,112.598 40.259,112.598 44.265,108.592 44.265,106.528 ; C33.1@43.434,106.528 44.265,106.528 ; R15.2@45.098,106.529 45.096,106.528 44.265,106.528
NetC40_2: C40.2 U11.7 | length 2.7
  Top Layer w0.254: U11.7@20.752,44.321 20.755,44.325 C40.2@23.482,44.325
NetC41_1: C41.1 D4.2 L1.2 U13.6 | length 16
  Top Layer w0.508: D4.2@138.201,84.252 138.201,87.706 139.969,89.474 U13.6@142.85,89.474 142.85,87.909 C41.1@143.078,87.681 141.757,86.36 L1.2@141.757,82.931
NetC41_2: C41.2 U13.1 | length 2.2
  Top Layer w0.508: C41.2@144.463,87.679 144.463,88.547 U13.1@145.39,89.474
NetC48_2: C48.2 C49.2 D5.2 R43.1 R44.1 R45.2 U13.3 U13.5 | length 15.8
  Top Layer w0.508: U13.5@142.85,90.424 143.642,90.424 144.592,91.374 U13.3@145.39,91.374 ; 144.49,91.272 143.053,92.71 R44.1@141.021,92.71 141.045,92.734 C49.2@141.045,94.196 141.719,94.196 142.037,93.878 C48.2@143.408,93.878 143.51,93.98 D5.2@146.558,93.98 ; R43.1@147.396,90.729 147.55,90.883 R45.2@148.907,90.883
NetC55_2: C55.2 U14.4 | length 7.5
  Top Layer w0.254: C55.2@15.634,17.347 19.887,17.347 21.209,18.669 U14.4@21.209,20.006
NetC56_2: C56.2 U14.8 Y3.1 | length 9.4
  Top Layer w0.254: Y3.1@26.8,12.675 26.8,17.37 26.289,17.882 U14.8@26.289,20.006 28.069,20.006 C56.2@28.13,20.068
NetC57_2: C57.2 U14.7 Y3.2 | length 13.1
  Top Layer w0.254: Y3.2@21.92,12.675 21.92,14.808 25.019,17.907 U14.7@25.019,20.006 25.019,21.336 25.148,21.465 C57.2@28.13,21.465
NetC58_1: C58.1 R50.1 U16.1 | length 24.7
  Top Layer w0.254: v1(136.398,36.576) 136.398,35.535 137.262,34.671 137.262,35.077 C58.1@138.1,35.077 ; U16.1@136.591,53.188 v1(138.455,53.188) 138.824,53.556 R50.1@138.824,54.864
  Bottom Layer w0.254: v1(136.398,36.576) 136.322,36.652 136.322,51.054 v1(138.455,53.188)
NetC58_2: C58.2 PHONE.1 | length 12.5
  Top Layer w0.254: C58.2@143.694,35.077 148.545,35.077 PHONE.1@148.898,35.43 150.343,36.875 150.343,39.985 PHONE.1@148.898,41.43
NetC59_1: C59.1 R51.1 | length 1.8
  Top Layer w0.254: C59.1@132.51,49.581 R51.1@134.29,49.581
NetC61_1: C61.1 R53.1 U16.7 | length 16.4
  Top Layer w0.254: C61.1@138.024,42.266 v1(140.183,42.266) ; v1(140.183,51.892) 140.208,51.918 U16.7@142.291,51.918 143.434,51.918 143.853,51.498 R53.1@144.655,51.498
  Bottom Layer w0.254: v1(140.183,42.266) v1(140.183,51.892)
NetC61_2: C61.2 PHONE.2 | length 15.5
  Top Layer w0.254: C61.2@143.618,42.266 145.999,42.266 146.406,42.672 151.156,42.672 PHONE.2@152.398,41.43 PHONE.2@152.398,35.43
NetC63_2: C63.2 R54.2 R55.1 | length 2.7
  Top Layer w0.254: R54.2@143.385,17.869 C63.2@144.744,17.869 146.108,17.869 R55.1@146.12,17.856
NetC64_2: C64.2 P11.1 R55.2 | length 6.8
  Top Layer w0.254: R55.2@146.119,16.472 C64.2@147.496,16.472 150.33,16.472 151.003,15.799 P11.1@152.603,15.799
NetC67_2: C67.2 U17.2 | length 2.5
  Top Layer w0.254: U17.2@90.765,28.727 93.207,28.727 C67.2@93.281,28.653
NetC72_2: C72.2 R58.2 | length 2.8
  Top Layer w0.254: R58.2@94.691,29.972 97.522,29.972 C72.2@97.523,29.974
NetC73_2: C73.2 R61.2 | length 2.9
  Top Layer w0.254: R61.2@94.691,31.242 97.471,31.242 C73.2@97.523,31.294
NetC83_2: C83.2 C84.2 C85.2 C86.2 L2.2 U18.23 U18.30 U18.42 | length 27.5
  Top Layer w0.254: L2.2@111.468,103.862 C83.2@111.468,102.313 C84.2@111.468,100.763 111.468,98.641 C86.2@111.277,98.45 111.277,97.561 112.039,96.799 115.087,96.799 117.45,99.162 118.923,99.162 119.463,98.622 U18.23@119.463,97.168 119.463,94.088 118.692,93.318 U18.30@117.613,93.318 ; U18.42@121.463,88.968 121.463,86.512 121.693,86.282 C85.2@121.693,85.179 122.542,85.179 v1(122.555,85.166)
NetC87_2: C87.2 R69.1 U19.18 Y4.1 | length 14.1
  Top Layer w0.254: Y4.1@120.088,49.505 120.088,50.365 121.056,51.333 121.056,52.705 ; C87.2@120.256,52.932 120.829,52.932 121.056,52.705 ; R69.1@121.869,52.934 121.31,52.934 121.082,52.705 121.056,52.705 ; U19.18@124.35,43.396 124.35,44.975 v1(124.435,45.06)
  Bottom Layer w0.254: Y4.1@120.088,49.505 121.412,49.505 124.435,46.482 v1(124.435,45.06)
NetC88_1: C88.1 R69.2 U19.17 Y4.2 | length 11.3
  Top Layer w0.254: R69.2@123.253,52.932 123.257,52.935 C88.1@124.727,52.935 124.968,52.694 Y4.2@124.968,49.505 ; U19.17@124.85,43.396 124.85,44.434 v1@125.247,44.831
  Bottom Layer w0.254: Y4.2@124.968,49.505 125.451,49.022 v1@125.451,45.034
  other v1: 125.451,44.907
NetC89_2: C89.2 C90.2 R71.1 R73.2 | length 10.7
  Top Layer w0.254: C89.2@126.086,25.222 128.753,25.222 C90.2@128.778,25.248 128.778,26.746 130.532,28.5 ; R71.1@129.007,29.477 129.007,29.01 129.516,28.5 130.532,28.5 ; R73.2@132.321,28.5 130.532,28.5
NetC90_1: C90.1 R75.2 R76.1 | length 6.1
  Top Layer w0.254: C90.1@128.778,22.962 131.902,22.962 132.334,23.394 R76.1@132.334,24.332 132.322,24.344 R75.2@132.322,25.73
NetC94_2: C94.2 U19.44 | length 4.7
  Top Layer w0.254: U19.44@124.85,35.196 124.85,33.138 125.706,32.282 C94.2@125.706,30.861
NetC95_1: C95.1 C96.2 MIC.1 R73.1 | length 8.1
  Top Layer w0.254: C96.2@132.322,27.127 132.334,27.127 R73.1@133.706,28.499 C95.1@133.706,30.021 135.079,30.021 MIC.1@137.363,27.737
NetC95_2: C95.2 C104.2 R78.2 U19.1 | length 29.8
  Top Layer w0.254: U19.1@128.2,36.546 129.773,36.546 v1(129.921,36.398) ; v1(131.14,30.023) C95.2@132.322,30.023 132.322,30.417 133.198,31.293 141.529,31.293 145.783,27.038 C104.2@145.783,24.462 R78.2@145.783,23.065
  Bottom Layer w0.254: v1(129.921,36.398) 131.14,35.179 v1(131.14,30.023)
NetC96_1: C96.1 C99.1 MIC.2 R75.1 | length 18.8
  Top Layer w0.254: v1(133.452,35.992) C99.1@133.452,37.084 ; C96.1@133.706,27.126 R75.1@133.706,25.729 135.104,25.729 135.636,25.197 MIC.2@137.363,25.197
  Bottom Layer w0.254: v1(133.452,35.992) 133.452,29.108 MIC.2@137.363,25.197
NetC97_2: C97.2 U18.43 Y5.2 | length 13.1
  Top Layer w0.254: U18.43@121.963,88.968 121.963,87.13 123.114,85.979 125.324,85.979 Y5.2@127.533,83.769 127.533,82.728 128.816,81.445 C97.2@128.816,80.012
NetC98_2: C98.2 U18.44 Y5.1 | length 17.2
  Top Layer w0.254: U18.44@122.463,88.968 122.463,87.189 123.292,86.36 126.975,86.36 129.565,83.769 Y5.1@132.413,83.769 132.413,82.629 131.928,82.144 C98.2@131.928,79.959
NetC99_2: C99.2 U19.2 | length 3.9
  Top Layer w0.254: U19.2@128.2,37.046 132.028,37.046 C99.2@132.067,37.086
NetC101_1: C101.1 LINE_IN.1 | length 10.3
  Top Layer w0.254: LINE_IN.1@148.986,31.667 150.266,30.387 150.266,26.948 LINE_IN.1@148.986,25.667 148.986,25.461 150.444,24.003 C101.1@150.444,23.038
NetC101_2: C101.2 R78.1 | length 1.9
  Top Layer w0.254: R78.1@147.168,23.063 147.191,23.039 C101.2@149.06,23.039
NetC102_1: C102.1 LINE_IN.2 | length 11.9
  Top Layer w0.254: C102.1@150.47,21.463 151.917,21.463 152.486,22.032 LINE_IN.2@152.486,25.667 LINE_IN.2@152.486,31.667
NetC102_2: C102.2 R79.1 | length 1.9
  Top Layer w0.254: R79.1@147.193,21.412 149.033,21.412 C102.2@149.085,21.465
NetC103_2: C103.2 R79.2 U19.48 | length 30.4
  Top Layer w0.254: U19.48@126.85,35.196 126.85,34.186 127.635,33.401 138.887,33.401 v1(139.7,32.588) ; v1(144.399,21.336) 144.477,21.414 R79.2@145.809,21.414 145.809,20.169 C103.2@145.783,20.144
  Bottom Layer w0.254: v1(139.7,32.588) 144.399,27.889 v1(144.399,21.336)
NetC105_2: C105.2 R80.1 R81.1 | length 16.4
  Top Layer w0.254: R80.1@130.912,89.078 134.137,89.078 136.677,91.618 136.677,93.269 ; R81.1@132.461,93.269 136.677,93.269 ; C105.2@139.648,94.196 139.648,93.496 139.421,93.269 136.677,93.269
NetC106_2: C106.2 R82.1 R83.1 | length 7.8
  Top Layer w0.254: R82.1@132.41,94.64 132.41,95.377 ; R83.1@132.41,96.114 132.41,95.377 ; C106.2@138.251,94.17 135.928,94.17 134.722,95.377 132.41,95.377
NetCAN_1: CAN.1 R30.2 U9.7 | length 21.2
  Top Layer w0.254: CAN.1@15.088,117.323 15.088,107.925 17.716,105.296 R30.2@17.716,101.776 17.716,99.606 18.312,99.011 U9.7@19.84,99.011
NetCAN_2: CAN.2 R30.1 U9.6 | length 24.7
  Top Layer w0.254: CAN.2@10.088,117.323 10.088,110.334 16.332,104.089 R30.1@16.332,101.778 16.332,99.466 18.058,97.741 U9.6@19.84,97.741
NetCOM2_2: COM2.2 U3.14 | length 17.5
  Top Layer w0.254: U3.14@98.577,97.984 98.577,99.797 99.67,100.889 102.794,100.889 107.442,105.537 COM2.2@107.442,109.982
NetCOM2_3: COM2.3 U3.13 | length 20.8
  Top Layer w0.254: U3.13@97.307,97.984 97.307,99.873 v1(97.739,100.305)
  Bottom Layer w0.254: v1(97.739,100.305) 97.739,100.406 98.704,101.371 104.648,101.371 110.211,106.934 COM2.3@110.211,109.982
NetCOM3_2: COM3.2 R14.2 | length 0.9
  Top Layer w0.254: R14.2@26.976,49.035 27.775,49.035 v1(27.813,48.997)
NetD5_1: D5.1 DC_IN.1 | length 6.5
  Top Layer w0.508: DC_IN.1@145.438,104.496 145.438,101.831 146.558,100.711 D5.1@146.558,98.425
NetD8_2: D8.2 Q2.3 R46.2 | length 9.2
  Top Layer w0.254: Q2.3@21.057,31.566 22.885,31.566 ; R46.2@21.577,36.193 22.43,36.193 22.885,35.738 22.885,31.566 ; D8.2@24.587,31.623 24.53,31.566 22.885,31.566
NetD9_2: D9.2 U18.34 | length 70.4
  Top Layer w0.254: D9.2@50.622,83.591 89.532,83.591 89.761,83.363 90.224,83.363 90.452,83.591 v1(100.787,83.591) ; v1(114.656,91.364) 114.702,91.318 U18.34@117.613,91.318
  Bottom Layer w0.254: v1(100.787,83.591) 106.883,83.591 v1(114.656,91.364)
NetDS0_1: DS0.1 R20.1 | length 2.3
  Top Layer w0.254: R20.1@90.221,4.75 90.221,4.216 90.678,3.759 DS0.1@90.678,2.591
NetDS1_1: DS1.1 R24.1 | length 2.3
  Top Layer w0.254: DS1.1@93.04,2.718 93.04,3.81 93.523,4.293 R24.1@93.523,4.775
NetLS1_2: LS1.2 R34.1 R37.2 | length 13.1
  Top Layer w0.254: LS1.2@35.941,3.81 44.272,3.81 45.809,5.347 R37.2@45.809,7.952
NetP9_5: P9.5 R32.2 | length 30.1
  Top Layer w0.254: v1(12.929,38.329) 13.057,38.2 R32.2@13.057,36.97
  Bottom Layer w0.254: v1(12.929,38.329) 13.716,39.116 13.716,49.279 13.64,49.355 13.64,50.975 13.665,51 13.665,51.463 13.64,51.489 13.64,60.528 P9.5@17.983,64.872
NetP9_6: P9.6 R33.2 | length 30.4
  Top Layer w0.254: v1(14.58,38.405) 14.581,38.403 R33.2@14.581,36.97
  Bottom Layer w0.254: v1(14.58,38.405) 14.58,58.951 20.5,64.872 P9.6@20.523,64.872
NetPWR_1: PWR.1 R26.1 | length 2.4
  Top Layer w0.254: R26.1@155.016,8.738 155.804,8.738 156.108,9.042 PWR.1@157.277,9.042
NetQ1_2: Q1.2 R36.2 R38.2 | length 4.7
  Top Layer w0.254: R38.2@47.142,10.236 47.142,10.871 47.498,11.227 ; R36.2@47.142,12.395 47.142,11.582 47.498,11.227 ; Q1.2@49.65,10.932 47.793,10.932 47.498,11.227
NetQ2_1: Q2.1 R48.1 U14.14 | length 10.8
  Top Layer w0.254: R48.1@17.729,28.372 18.567,28.372 ; U14.14@19.939,25.206 19.939,27 18.567,28.372 ; Q2.1@20.107,33.916 20.107,32.857 19.355,32.106 19.355,29.007 18.72,28.372 18.567,28.372
NetQ2_2: Q2.2 R47.1 | length 6.4
  Top Layer w0.254: R47.1@21.846,29.731 20.944,30.632 20.244,30.632 19.787,31.09 19.787,31.696 Q2.2@22.007,33.916
NetQ3_2: Q3.2 R48.2 | length 2.7
  Top Layer w0.254: Q3.2@16.652,31.667 17.279,31.667 17.731,31.215 R48.2@17.731,29.756
NetQ3_3: Q3.3 R49.1 | length 2.7
  Top Layer w0.254: R49.1@16.764,36.322 16.764,35.331 17.602,34.493 Q3.3@17.602,34.017
NetR16_2: R16.2 U4.8 | length 25.9
  Top Layer w0.254: U4.8@2.032,112.243 0.711,110.922 0.711,94.894 1.878,93.728 R16.2@8.191,93.728
NetR17_1: R17.1 U3.9 | length 2.3
  Top Layer w0.254: R17.1@92.202,95.733 92.202,97.959 U3.9@92.227,97.984
NetR19_1: R19.1 R25.2 RS485.1 U7.7 | length 5.5
  Top Layer w0.254: R19.1@131.94,77.014 131.94,76.365 132.156,76.149 133.172,76.149 133.325,75.997 R25.2@133.325,75.487
  Top Layer w0.508: U7.7@129.195,77.114 131.84,77.114 R19.1@131.94,77.014
NetR22_2: R22.2 R25.1 RS485.2 U7.6 | length 9.1
  Top Layer w0.254: R22.2@125.717,80.062 125.717,78.448 128.321,75.844 U7.6@129.195,75.844
  Top Layer w0.508: U7.6@129.195,75.844 130.759,75.844 131.115,75.489 R25.1@131.94,75.489
NetR32_1: R32.1 USB_SLAVE.2 | length 9.8
  Top Layer w0.254: USB_SLAVE.2@8.993,28.969 11.519,28.969 12.979,30.429 12.979,35.585 R32.1@13.056,35.585